# Altium PCB Copy of PCB2.PcbDoc
Units mm, origin at the board's own origin, x right, y up, seen from the top; angles counter-clockwise.
Board outline 79.5 x 87 mm, 2 copper layers (Top Layer, Bottom Layer); 60 components, 155 nets, 264 pads, 23 vias.
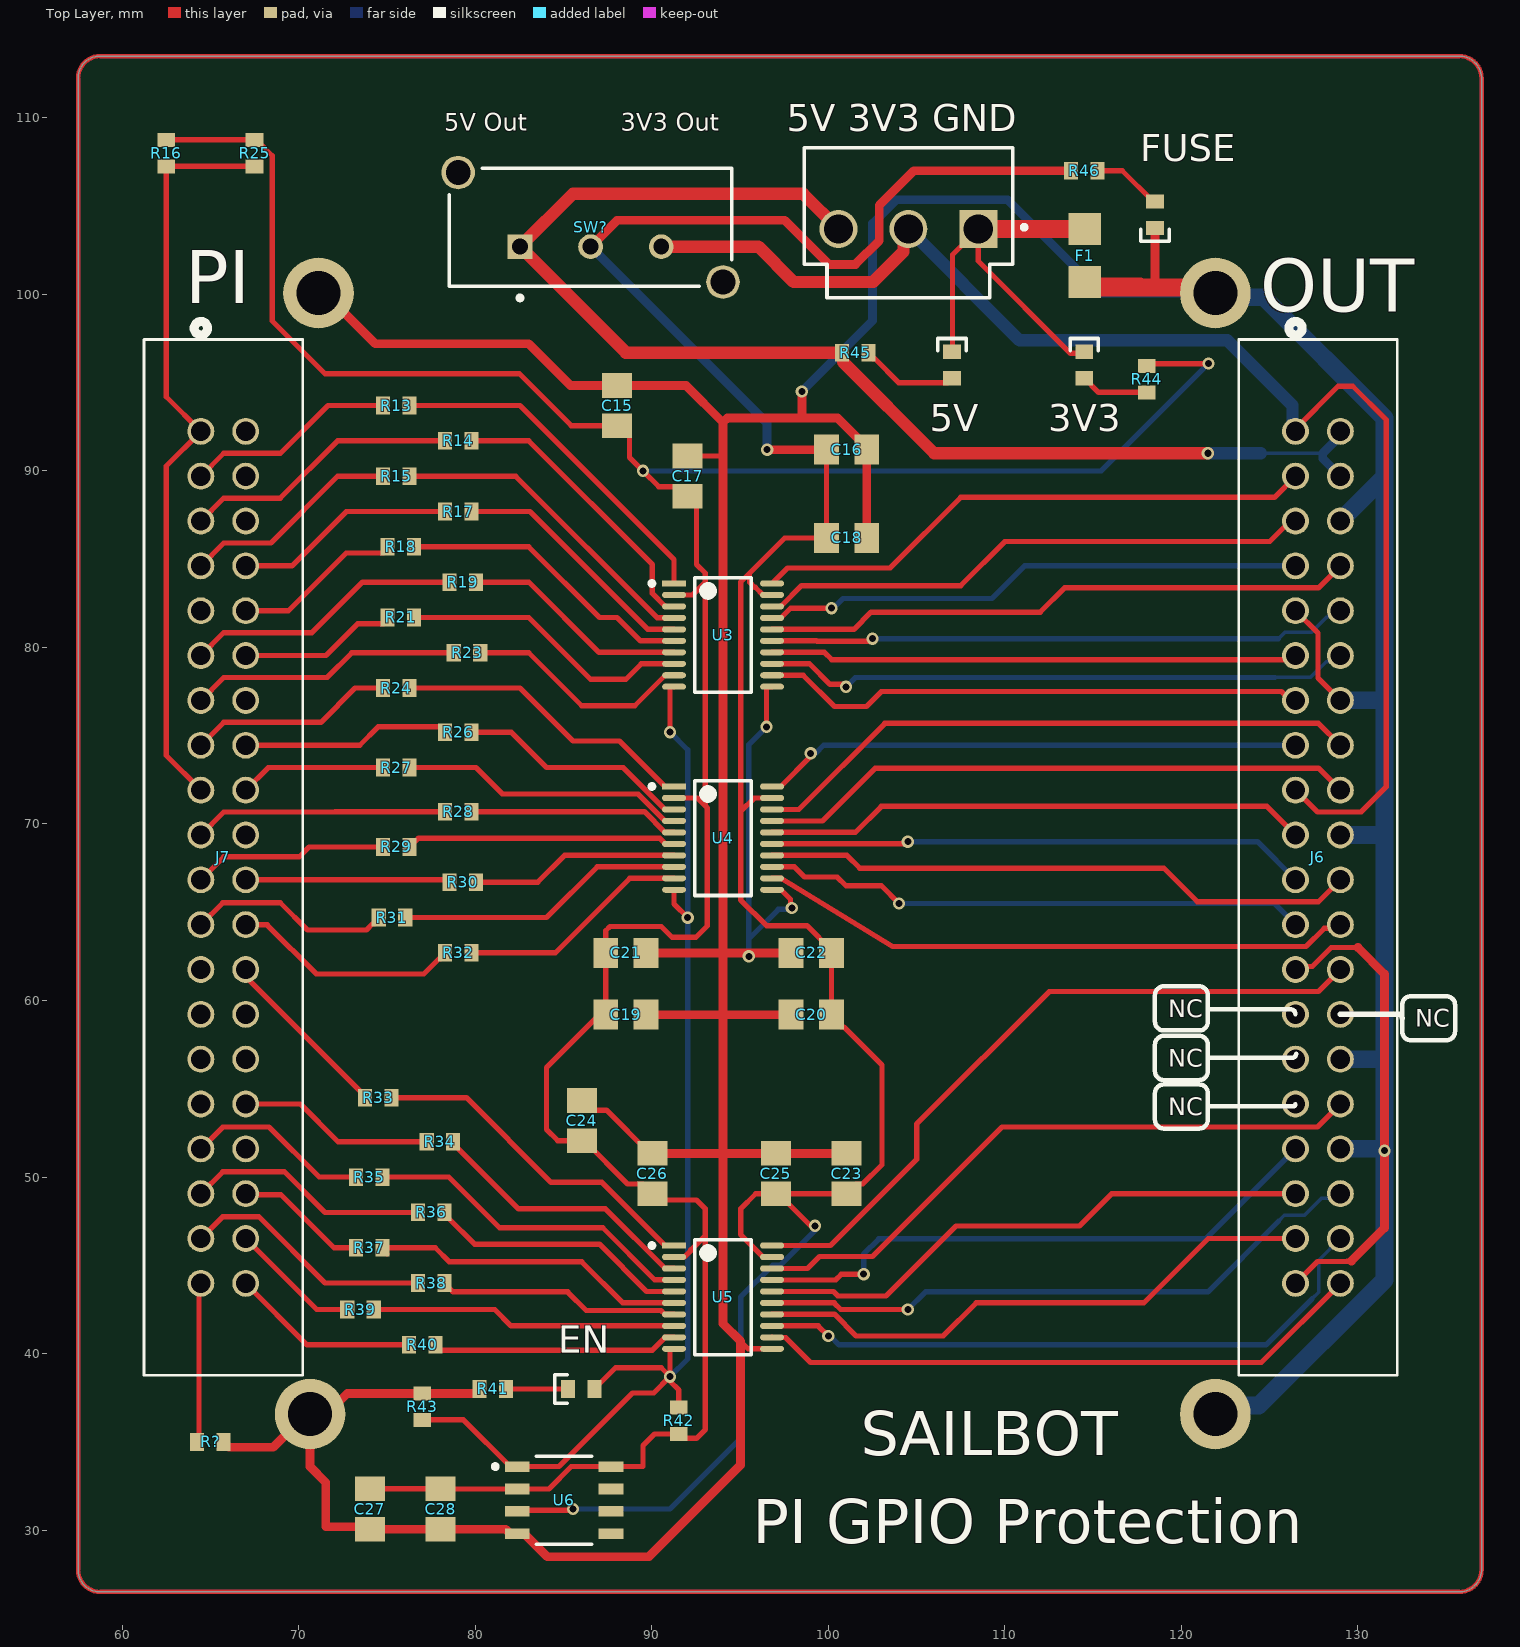
[diagram p0: Top Layer view]
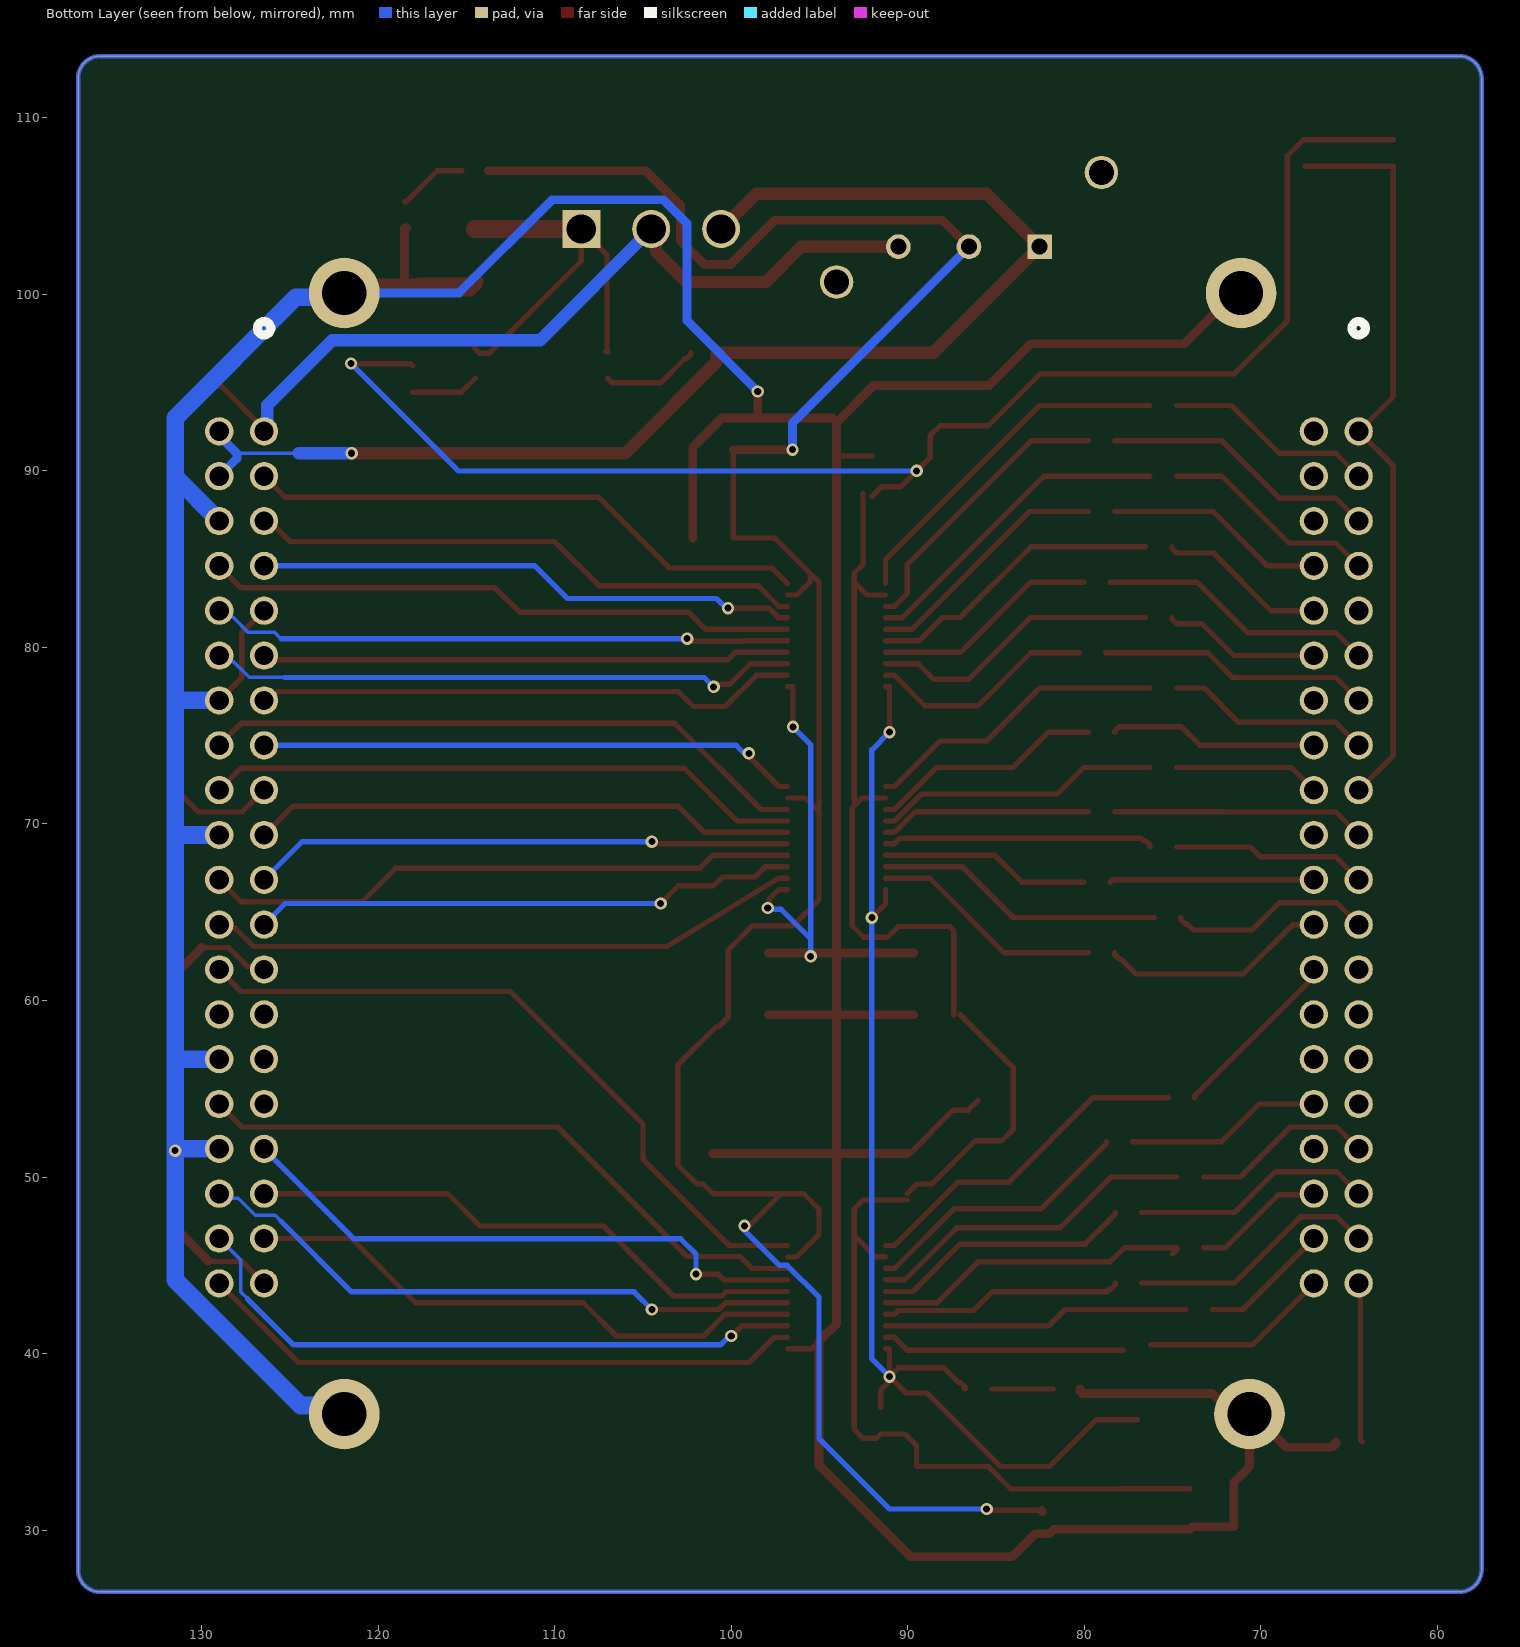
[diagram p1: Bottom Layer view, seen from below]

## Layer stack, top to bottom
Top Solder: solder mask 0.0102, Solder Resist, Dk 3.5
Top Layer: signal copper 0.0356
Dielectric 1: dielectric 0.32, FR-4, Dk 4.8
Bottom Layer: signal copper 0.0356
Bottom Solder: solder mask 0.0102, Solder Resist, Dk 3.5

## Board outline
57.5,27.77 57.5,112.23 cw(c58.77,112.23) 58.77,113.5 135.73,113.5 cw(c135.73,112.23) 137,112.23 137,27.77 cw(c135.73,27.77) 135.73,26.5 58.77,26.5 cw(c58.77,27.77)

## Design rules (kind name [scope] priority, off if disabled: settings)
Clearance [All] p1: gap=0.254 ignorepadtopadclearanceinfootprint=FALSE except(0: Arc-Hole Track-Hole SMDPad-Hole THPad-Hole Via-Hole Fill-Hole Poly-Hole Region-Hole Text-Hole; 0.127: Arc-Arc Arc-Track Arc-SMDPad Track-Track Track-SMDPad SMDPad-SMDPad; 0.33: Arc-THPad Arc-Via Track-THPad Track-Via SMDPad-THPad SMDPad-Via THPad-Via Via-Via; 0.5: THPad-THPad)
DiffPairsRouting [All] p1: maxlimit=0.2 minlimit=0.2 mostfreqgap=0.2 toplayer_minwidth=0.235 toplayer_maxwidth=0.235 toplayer_prefwidth=0.235 bottomlayer_minwidth=0.235 bottomlayer_maxwidth=0.235 bottomlayer_prefwidth=0.235 impedanceprofiledriven=TRUE impedanceprofileid={3DAFF3E0-E45B-4C19-A753-60FD53768F31} maxuncoupledlength=12.7
HoleSize [IsVia] p1: absolutevalues=TRUE maxlimit=2.54 minlimit=0 maxpercent=80.000 minpercent=20.000
PolygonConnect [All] p1: connectstyle=Direct reliefconductorwidth=0.254 reliefentries=4 polygonreliefangle="90 Angle" airgapwidth=0.254
RoutingVias [All] p1: holewidth=0.4 width=0.7 viastyle="Through Hole" minholewidth=0.3 minwidth=0.55 maxholewidth=0.4 maxwidth=0.9
SolderMaskExpansion [All] p1: expansion=0.102 istentingtop=FALSE
UnRoutedNet [All] p1: checkbadconnections=TRUE
Width [All] p1: maxlimit=1 minlimit=0.13 preferedwidth=0.3 minimp=50.000000 maximp=50.000000 favimp=50.000000
27 further rules are at their usual default settings.

## Classes and differential pairs
component class Shifter: 5V "5V 3V3 GND" C16 C18 C19 C20 C21 C22 C23 C24 C25 C26 C27 C28 EN F1 FUSE J6 J7 R13 R14 R15 R16 R17 R18 R19 R21 R23 R24 R25 R26 R27 R28 R29 R30 R31 R32 R33 R34 R35 R36 R37 R38 R39 R40 R41 R42 R43 R45 R46 R? SW? U3 U4 U5 U6
differential pair USB_D: +USB_D_P -USB_D_N

## Components (designator, comment, footprint, x,y, rotation, side; value= is the part's Value field where it differs from the comment)
3V3 "GREEN" LED_0603_GREEN 114.5,96 r270 top (schematic designator D_3V3)
5V "GREEN" LED_0603_GREEN 107,96 r270 top (schematic designator D_5V)
"5V 3V3 GND" "B3P-VH(LF)(SN)" JST-B3P-VH(LF)(SN)-3_V 104.534,104.95 r180 top (schematic designator Input)
C15 "22uF" CAP_0805 88.034,93.7 r270 top
C16 "22uF" CAP_0805 101.034,91.2 r0 top
C17 "100nF" CAP_0805 92.034,89.7 r270 top
C18 "100nF" CAP_0805 101.034,86.2 r0 top
C19 "22uF" CAP_0805 88.534,59.2 r180 top
C20 "22uF" CAP_0805 99.034,59.2 r180 top
C21 "100nF" CAP_0805 88.534,62.7 r180 top
C22 "100nF" CAP_0805 99.034,62.7 r180 top
C23 "22uF" CAP_0805 101.034,50.2 r90 top
C24 "22uF" CAP_0805 86.034,53.2 r270 top
C25 "100nF" CAP_0805 97.034,50.2 r90 top
C26 "100nF" CAP_0805 90.034,50.2 r270 top
C27 "22uF" CAP_0805 74.034,31.2 r90 top
C28 "100nF" CAP_0805 78.034,31.2 r270 top
EN "GREEN" LED_0603_GREEN 86,38 r0 top (schematic designator D_EN)
F1 "270mA" FUSE_1206 114.534,102.2 r270 top
FUSE "GREEN" LED_0603_GREEN 118.5,104.5 r90 top (schematic designator D_FUSE)
J6 "BUFFER_HIGH" CONN_3020-40-0100-00_CNC 126.46,92.24 r270 top
J7 "BUFFER_LOW" CONN_3020-40-0100-00_CNC 64.46,92.24 r270 top
R13 "1k" RES_0603 75.534,93.7 r0 top
R14 "1k" RES_0603 79.034,91.7 r0 top
R15 "1k" RES_0603 75.534,89.7 r0 top
R16 "1K" RES_0603 62.5,108 r90 top
R17 "1k" RES_0603 79.034,87.7 r0 top
R18 "1k" RES_0603 75.784,85.7 r0 top
R19 "1k" RES_0603 79.284,83.7 r0 top
R21 "1k" RES_0603 75.784,81.7 r0 top
R23 "1k" RES_0603 79.534,79.7 r0 top
R24 "1k" RES_0603 75.534,77.7 r0 top
R25 "1K" RES_0603 67.5,108 r90 top
R26 "1k" RES_0603 79.034,75.2 r0 top
R27 "1k" RES_0603 75.534,73.2 r0 top
R28 "1k" RES_0603 79.034,70.7 r0 top
R29 "1k" RES_0603 75.534,68.7 r0 top
R30 "1k" RES_0603 79.284,66.7 r0 top
R31 "1k" RES_0603 75.284,64.7 r0 top
R32 "1k" RES_0603 79.034,62.7 r0 top
R33 "1k" RES_0603 74.5,54.5 r0 top
R34 "1k" RES_0603 78,52 r0 top
R35 "1k" RES_0603 74,50 r0 top
R36 "1k" RES_0603 77.5,48 r0 top
R37 "1k" RES_0603 74,46 r0 top
R38 "1k" RES_0603 77.5,44 r0 top
R39 "1k" RES_0603 73.5,42.5 r0 top
R40 "1k" RES_0603 77,40.5 r0 top
R41 "1k" RES_0603 81,38 r0 top
R42 "Infinity" RES_0603 91.534,36.2 r90 top
R43 "Infinity" RES_0603 77,37 r90 top
R44 "1k" RES_0603 118.034,95.2 r270 top
R45 "1k" RES_0603 101.534,96.7 r0 top
R46 "1k" RES_0603 114.5,107 r0 top
R? "10K" RES_0603 65,35 r0 top
SW? "1825255-1" TECO-1825255-1_V 86.534,103.8 r0 top
U3 "TXS0108EPWR" FP-PW0020A-IPC_C 94.034,80.7 r0 top
U4 "TXS0108EPWR" FP-PW0020A-IPC_C 94.034,69.2 r0 top
U5 "TXS0108EPWR" FP-PW0020A-IPC_C 94.034,43.2 r0 top
U6 "LM2903DT" FP-SO8-SO-A-MFG 85.034,31.7 r0 top

## Footprints (in the part's own frame and the unit in brackets; to place one, negate y for a bottom-side part, rotate by r counter-clockwise, add the part's x,y. Pads: shape width x height; smd on the part's side, far side on the other; paste and mask are expansions set on the pad)
CAP_0805 [mm]
  rect 1.4x1.7 smd: 1(-1.143,0) 2(1.143,0)
  body extent -1.15,-0.76 1.15,0.79, height 1.01
CONN_3020-40-0100-00_CNC [mil]
  round 60 / inner round 60 / far side round 63 hole 43 paste-31.5 mask-31.5: 1(0,0) 2(0,100) 3(100,0) 4(100,100) 5(200,0) 6(200,100) 7(300,0) 8(300,100) 9(400,0) 10(400,100) 11(500,0) 12(500,100) 13(600,0) 14(600,100) 15(700,0) 16(700,100) 17(800,0) 18(800,100) 19(900,0) 20(900,100) 21(1000,0) 22(1000,100) 23(1100,0) 24(1100,100) 25(1200,0) 26(1200,100) 27(1300,0) 28(1300,100) 29(1400,0) 30(1400,100) 31(1500,0) 32(1500,100) 33(1600,0) 34(1600,100) 35(1700,0) 36(1700,100) 37(1800,0) 38(1800,100) 39(1900,0) 40(1900,100)
  silkscreen extent -245,-127 2105,227
FP-PW0020A-IPC_C [mm]
  rect 1.355x0.341 smd paste+0 mask+0: 1(-2.775,2.925)
  rrect100% 1.355x0.341 smd paste+0 mask+0: 2(-2.775,2.275) 3(-2.775,1.625) 4(-2.775,0.975) 5(-2.775,0.325) 6(-2.775,-0.325) 7(-2.775,-0.975) 8(-2.775,-1.625) 9(-2.775,-2.275) 10(-2.775,-2.925) 11(2.775,-2.925) 12(2.775,-2.275) 13(2.775,-1.625) 14(2.775,-0.975) 15(2.775,-0.325) 16(2.775,0.325) 17(2.775,0.975) 18(2.775,1.625) 19(2.775,2.275) 20(2.775,2.925)
  silkscreen extent -4.15,-3.25 1.6,3.25, body extent -3.55,-3.35 3.55,3.35, height 0.25
FP-SO8-SO-A-MFG [mm]
  rect 1.4x0.6 smd paste+0 mask+0: 1(-2.65,1.905) 2(-2.65,0.635) 3(-2.65,-0.635) 4(-2.65,-1.905) 5(2.65,-1.905) 6(2.65,-0.635) 7(2.65,0.635) 8(2.65,1.905)
  silkscreen extent -4.02,-2.5 1.57,2.5, body extent -3.45,-2.6 3.45,2.6, height 0.25
FUSE_1206 [mm]
  rect 1.8x1.84 smd: 1(-1.5,0) 2(1.5,0)
  body extent -1.65,-0.82 1.65,0.81, height 0.84
JST-B3P-VH(LF)(SN)-3_V [mm] "Connector, 3-Leads, Body 8.5x11.82mm, Pitch 3.96mm"
  rect 2.15x2.15 hole 1.65: 1(-3.96,1.25)
  round 2.15 hole 1.65: 2(0,1.25) 3(3.96,1.25)
  silkscreen extent -6.69,-3.35 5.91,5.15, body extent -5.91,-3.35 5.91,5.15, height 10.9
LED_0603_GREEN [mm]
  rect 0.8x1 smd: A(0.75,0) K(-0.75,0)
  silkscreen extent -1.5,-0.8 -0.8,0.8, body extent -0.8,-0.4 0.8,0.4, height 0.6
RES_0603 [mm]
  rect 0.8x1 smd: 1(-0.75,0) 2(0.75,0)
  body extent -0.8,-0.43 0.8,0.43, height 0.52
TECO-1825255-1_V [mm] "THD, 5-Leads, Body 6.7x16mm, Pitch 4mm"
  rect 1.4x1.4 hole 0.9: 1(-4,-1.1)
  round 1.4 hole 0.9: 2(0,-1.1) 3(4,-1.1)
  round 1.9 hole 1.4: MH1(-7.5,3.1) MH2(7.5,-3.1)
  silkscreen extent -8,-4.12 8,3.35, body extent -8,-3.35 8,3.35, height 12

## Part data
3V3 5V EN FUSE: library part LED_0603_GREEN, "LED 0603 GREEN SMD"
"5V 3V3 GND": library part CMP-002-00026-2, "Male Header, Pitch 3.96 mm, 1 x 3 Position, Height 10.9 mm, Tail Length 3.7 mm, -25 to 85 degC, RoHS, Bulk", Manufacturer=JST, Max Operating Temperature=85°C, Min Operating Temperature=-25°C, Package Description="Male Header, Pitch 3.96 mm, 1 x 3 Position, Height 10.9 mm, Tail Length 3.7 mm", Case/Package=B3P-VH(LF)(SN), Connector Type=Header, Datasheet URL=http://www.jst-mfg.com/product/pdf/eng/eVH.pdf, Datasheet Version=May-16, Gender=Male, Manufacturer URL=http://www.jst.com/home2.html, Mounting Technology=TH, Package Reference=B3P-VH(LF)(SN), RoHS Compliant=Unknown
C15 C16 C17 C18 C19 C20 C21 C22 C23 C24 C25 C26 C27 C28: library part CAP_0805_16V, "Capacitor SMD 0805 16V"
F1: library part FUSE_PPTC_1206, "Fuse PPTC SMD 1206 / SMD1206B010TF"
J6 J7: library part 3020-40-0100-00, "No Description Available", Mfr_Name="CNC Tech", RefDes=RefDes, Type=Type
R13 R14 R15 R16 R17 R18 R19 R21 R23 R24 R25 R26 R27 R28 R29 R30 R31 R32 R33 R34 R35 R36 R37 R38 R39 R40 R41 R42 R43 R44 R45 R46 R?: library part RES_0603, "Resistor SMD 0603"
SW?: library part CMP-011-00001-2, "Slide Switch, SPDT, 0.3A, 125 V, -20 to 85 degC, 5-Pin THD, RoHS, Tray", Current Rating=300mA, Manufacturer="TE Connectivity", Max Contact Resistance=30mohm, Max Operating Temperature=85°C, Max Voltage Rating (AC)=125V, Min Operating Temperature=-20°C, Operating Force=600gf, Package Description="5-Pin Through Hole Device, Body 6.7 x 16 mm, Pitch 4 mm", Package Quantity=560, Case/Package=1825255-1, Contact Finish=Silver, Contact Material=Copper, Contact Plating=Silver, Datasheet URL=http://www.te.com/commerce/DocumentDelivery/DDEController?Action=showdoc&DocId=Customer+Drawing%7F1825255%7FA4%7Fpdf%7FEnglish%7FENG_CD_1825255_A4_baseFilename.pdf%7F1825255-1, Datasheet Version="Rev. A4, 03/2014", Manufacturer URL=http://www.te.com/, Max Current Rating=300mA, Mounting Technology=TH, Package Reference=1825255-1, Packaging=Bulk, RoHS Compliant=True, Throw Configuration=SPDT, Voltage Rating (AC)=125V
U3 U4 U5: library part CMP-2000-04956-2, "IC TRNSLTR BIDIRECTIONAL 20TSSOP", Case/Package=TSSOP, High Level Output Current=-50mA, Low Level Output Current=50mA, Max Operating Temperature=85°C, Max Supply Voltage=5.5V, Min Operating Temperature=-40°C, Min Supply Voltage=1.2V, Nominal Supply Current=8uA, Output Current=620uA, Package Quantity=1, Quiescent Current=3uA, Contact Plating=Gold, Data Rate=60Mbps, Height=1.15mm, Lead Free="Lead Free", Length=6.5mm, Logic Function=Translator, Mount="Surface Mount", Number of Bits=8, Number of Channels=8, Number of Inputs=8, Number of Pins=20, Output Type=Voltage, Packaging="Tape and Reel", Propagation Delay=4.8ns, Radiation Hardening=No, REACH SVHC="No SVHC", Rise Time=6.3ns, RoHS Compliant=Yes, Series=-, Supply Current=8uA, Termination=SMD/SMT, Turn-On Delay Time=312ns, Weight=0.002716oz, Width=4.4mm
U6: library part CMP-12132-000004-1, "IC COMPARATOR LP DUAL 8-SOIC", Ambient Temperature Range High=+125°C, Ambient Temperature Range Low=-40°C, Input Bias Current=0.025uA, Input Offset Voltage=1mV, Manufacturer=STMicroelectronics, Max Dual Supply Voltage=18V, Max Junction Temp=+150°C, Max Supply Voltage=36V, Min Dual Supply Voltage=1V, Min Supply Voltage=2V, Nominal Supply Current=0.4-1mA, Output Current Per Channel=16mA, Package=SO8-SO-A, Temperature="to +150°C", Voltage Gain=200V/mV, Automotive=No, Category=IC, ComponentLink2Description=Datasheet, ComponentLink2URL=https://www.st.com/content/ccc/resource/technical/document/datasheet/44/f7/9d/99/42/20/45/fd/CD00000534.pdf/files/CD00000534.pdf/jcr:content/translations/en.CD00000534.pdf, Device Class L1="Integrated Circuits (ICs)", Device Class L2="Linear ICs", Device Class L3=Comparators, Digikey Description="IC COMPARATOR LP DUAL 8-SOIC", Footprint Url=https://www.st.com/content/ccc/resource/technical/document/datasheet/group3/16/9a/68/4c/7d/03/4a/09/DM00396770/files/DM00396770.pdf/jcr:content/translations/en.DM00396770.pdf, Height=1.75mm, Ipc Land Pattern Name=SOIC127P600X175-8, Lead Free=Yes, Manufacturer Part Number=LM2903DT, Mouser Description="Analog Comparators Lo-Pwr Dual Voltage", Number of Channels=2, Octopart=https://octopart.com/lm2903dt-stmicroelectronics-428473, Response Time=1.3us, RoHS=TRUE, Standoff Height=0.1mm, Temperature Range High=+150°C

## Free pads (board coordinates)
  round 4 hole 2.5: 5(71.12,100.076) 6(121.92,100.076) 7(121.92,36.576) 8(70.645,36.576)

## Via types
v1: diameter 0.7, hole 0.4, Top Layer to Bottom Layer, 23 vias

## Nets (pads, with @x,y where several pads share a name; then routed paths per layer and width w, separated by ;. In a path a pad name is that pad's centre, name@x,y a point inside that pad or via, vN(x,y) a via of type N, cw(c..) or ccw(c..) an arc to the next point about the centre after c; other vN are vias at no path point)
3V3: "5V 3V3 GND.2" J6.1 J6.17 SW?.3 | length 78.2
  Top Layer w0.3: J6.17 127.702,70.678 130.178,70.678 131.592,72.092 131.592,92.908 129.703,94.797 128.875,94.797 J6.1@126.46,92.382
  Top Layer w0.7: SW?.3 96.034,102.7 98.034,100.7 102.534,100.7 104.256,102.423 104.256,103.423 104.534,103.7
  Top Layer w1: J6.1 J6.1@126.46,92.382
  Bottom Layer w0.7: 104.534,103.7 110.838,97.396 122.604,97.396 126.288,93.712 126.288,92.412 J6.1
3V3PI: C15.2 C17.2 C19.2 C21.2 C24.2 C26.2 C27.2 C28.1 R16.2 R25.2 R42.1 R44.1 U3.2 U4.2 U5.2 U6.2 U6.8 | length 176.7
  Top Layer w0.3: R16.2 R25.2 67.6,108.75 68.5,107.85 68.5,98.5 71.5,95.5 82.5,95.5 85.443,92.557 88.184,92.557 88.734,92.007 88.734,90.768 89.5,90.002 v1(89.5,90) 90.393,89.107 91.484,89.107 C17.2 ; C27.2 C28.1 78.038,32.339 82.38,32.339 U6.2 84.169,32.335 85.439,33.605 U6.8 89.506,33.605 89.506,34.795 90.161,35.45 R42.1 91.784,35.2 92.534,35.2 93.034,35.7 93.034,46.7 ; C19.2@87.034,59.2 84.034,56.2 84.034,52.7 84.677,52.057 C24.2 86.184,52.057 88.634,49.607 89.484,49.607 C26.2 ; C19.2 C21.2 87.391,63.953 87.637,64.2 90.534,64.2 91.149,63.585 92.495,63.585 93.149,64.238 93.149,70.909 93.034,71.024 ; C26.2@90.034,48.7 92.534,48.7 93.034,48.2 93.034,46.7 ; U5.2 91.266,45.483 91.856,45.483 92.213,45.84 92.213,45.879 93.034,46.7 ; U4.2 92.583,71.475 93.034,71.024 ; U3.2 92.309,82.975 93.034,83.7 ; C17.2@92.534,88.7 92.534,84.7 93.034,84.2 93.034,83.7 ; R44.1 118.159,96.075 121.528,96.075 v1(121.534,96.081) ; 93.034,71.024 93.034,83.7
  Bottom Layer w0.3: v1(89.5,90) 115.453,90 v1(121.534,96.081)
3V3PI_Unprotected: J7.1 J7.17 R16.1 R25.1 | length 42.8
  Top Layer w0.3: J7.17 62.5,73.88 62.5,90.28 J7.1 62.5,94.2 R16.1 R25.1
5V: "5V 3V3 GND.3" J6.2 J6.4 R45.1 SW?.1 | length 74.1
  Top Layer w0.7: 100.574,103.7 98.574,105.7 85.534,105.7 SW?.1 88.534,96.7 R45.1 100.834,96.65 100.834,96.166 106,91 v1(121.5,91)
  Bottom Layer w0.2: 124.5,91 128,91
  Bottom Layer w0.5: J6.4 128,90.7 128,91 129,92 J6.2
  Bottom Layer w0.7: v1(121.5,91) 124.5,91
CMP_Out: EN.A R42.2 R43.1 U3.10 U4.10 U5.10 U6.1 | length 68.2
  Top Layer w0.3: R43.1 79.339,36.25 81.984,33.605 U6.1 84.748,33.605 88.918,37.775 90.109,37.775 v1(91.034,38.7) ; EN.A@86.825,38.075 EN.A 86.75,38.1 87,38.35 87.1,38.35 87.95,39.2 90.534,39.2 v1(91.034,38.7) ; v1(91.034,75.2) 91.034,77.756 91.052,77.775 U3.10 ; U5.10 91.052,40.275 91.034,40.256 v1(91.034,38.7) ; U4.10 91.258,65.475 v1(92.034,64.7) ; R42.2 91.534,37.938 91.034,38.438 v1(91.034,38.7)
  Bottom Layer w0.3: v1(91.034,38.7) 92.034,39.7 v1(92.034,64.7) 92.034,74.2 v1(91.034,75.2)
ENABLE_LED: EN.K R41.2 | length 3.5
  Top Layer w0.3: R41.2 EN.K
GND: C15.1 C16.2 C17.1 C18.2 C19.1 C20.2 C21.1 C22.2 C23.2 C24.1 C25.2 C26.1 C27.1 C28.2 F1.2 FUSE.K J6.6 J6.9 J6.14 J6.20 J6.25 J6.30 J6.34 J6.39 pad.5 pad.6 pad.7 pad.8 R41.1 R43.2 R?.2 U3.11 U4.11 U5.11 U6.4 | length 375.4
  Top Layer w0.3: C24.1 86.584,53.793 87.434,53.793 89.884,51.343 C26.1 ; C17.1 93.891,90.843 94.034,90.7 ; 95.034,40.7 95.459,40.275 U5.11 ; v1(96.5,75.5) 96.5,77.756 96.519,77.775 U3.11 ; U4.11 97.316,66.275 97.855,65.736 97.855,65.321 v1(97.932,65.244) ; J6.39 127.702,45.222 129.372,45.222 129.4,45.25 129.628,45.25 ; J6.25 126.625,61.925 127.409,61.925 128.486,63.002 129.998,63.002 ; J6.9 127.73,80.81 127.73,78.27 J6.14
  Top Layer w0.5: R?.2 65.75,34.9 65.9,34.75 66,34.75 66.05,34.7 68.555,34.7 pad.8@70.355,36.5 ; pad.8@70.645,36.5 70.645,33.589 71.534,32.7 71.534,30.2 73.891,30.2 C27.1 C28.2 81.722,30.057 81.984,29.795 U6.4 82.784,29.795 84.079,28.5 89.834,28.5 95.034,33.7 95.034,40.7 94.034,41.7 94.034,51.343 ; pad.8 71.592,36.576 72.766,37.75 R43.2 80.1,37.75 80.25,37.9 R41.1 ; pad.5@71.534,100 74.334,97.2 83.034,97.2 85.391,94.843 C15.1 91.934,94.843 94.034,92.743 ; C19.1 94.034,59.2 ; C21.1 94.034,62.7 ; C26.1 94.034,51.343 ; C20.2 94.034,59.2 ; C22.2 94.034,62.7 ; v1(98.5,94.5) 98.5,92.993 ; C23.2 C25.2 94.034,51.343 ; C18.2 C16.2 102.177,91.35 100.534,92.993 98.5,92.993 ; F1.2 117.684,100.7 ; FUSE.K@118.4,103.75 FUSE.K 118.5,100.388 ; 129.628,45.25 131.5,47.122 131.5,61.5 129.998,63.002 ; 94.034,51.343 94.034,59.2 ; 94.034,59.2 94.034,62.7 ; 94.034,62.7 94.034,90.7 94.034,92.743 ; 94.034,92.743 94.284,92.993 98.5,92.993
  Top Layer w1: F1.2 114.846,100.388 118.5,100.388 121.608,100.388 pad.6
  Bottom Layer w0.3: v1(95.5,62.5) 95.5,63.5 ; v1(96.5,75.5) 95.5,74.5 95.5,63.5 ; v1(97.932,65.244) 97.855,65.168 97.168,65.168 95.5,63.5
  Bottom Layer w0.5: v1(98.5,94.5) 102.5,98.5 102.5,104.007 103.848,105.355 110.145,105.355 115.424,100.076 pad.6 ; 131.18,56.68 131.5,57 ; 131.38,69.38 131.5,69.5
  Bottom Layer w1: pad.7 122.404,37.06 124.386,37.06 131.5,44.175 v1(131.5,51.5) ; pad.6 122.166,99.83 124.67,99.83 131.5,93 131.5,89.66 ; J6.34 131.327,51.6 131.427,51.5 v1(131.5,51.5) ; J6.30 131.18,56.68 ; J6.20 131.38,69.38 ; J6.14 131.5,77 ; J6.6 131.5,89.66 ; v1(131.5,51.5) 131.5,57 131.5,69.5 131.5,77 ; 131.5,77 131.5,89.66
GND_INPUT: 3V3.K 5V.K "5V 3V3 GND.1" F1.1 | length 23.8
  Top Layer w0.3: 5V.K 5V.K@107.034,96.75 ; 5V.K@107.1,96.75 5V.K@107.034,96.75 ; 3V3.K@114.534,96.966 114.225,96.658 113.726,96.658 108.494,101.89 108.494,103.7 107.034,102.24 5V.K@107.034,96.75
  Top Layer w1: 108.494,103.7 F1.1
GPIO_3: 
GPIO_5: 
GPIO_7: 
GPIO_8: 
GPIO_10: 
GPIO_11: 
GPIO_12: 
GPIO_13: 
GPIO_15: 
GPIO_16: 
GPIO_18: 
GPIO_19: 
GPIO_21: 
GPIO_22: 
GPIO_23: 
GPIO_24: 
GPIO_26: 
GPIO_27: 
GPIO_28: 
GPIO_29: 
GPIO_31: 
GPIO_32: 
GPIO_33: 
GPIO_35: 
GPIO_36: 
GPIO_37: 
GPIO_38: 
GPIO_40: 
IN_3: R13.2 U3.1 | length 19.9
  Top Layer w0.3: R13.2 82.534,93.7 91.258,84.975 U3.1
IN_5: R14.2 U3.3 | length 16.3
  Top Layer w0.3: R14.2 83.034,91.7 90.034,84.7 90.034,83.06 90.73,82.363 90.73,82.356 90.762,82.325 U3.3
IN_7: R15.2 U3.4 | length 18.3
  Top Layer w0.3: R15.2 82.291,89.7 90.316,81.675 U3.4
IN_8: R17.2 U3.5 | length 14.2
  Top Layer w0.3: R17.2 83.1,87.7 89.775,81.025 U3.5
IN_10: R18.2 U3.6 | length 16.9
  Top Layer w0.3: R18.2 83.034,85.7 87.034,81.7 88.034,81.7 89.359,80.375 U3.6
IN_11: R19.2 U3.7 | length 12.9
  Top Layer w0.3: R19.2 83.034,83.7 87.009,79.725 U3.7
IN_12: R21.2 U3.8 | length 16.5
  Top Layer w0.3: R21.2 83.034,81.7 86.534,78.2 88.534,78.2 89.409,79.075 U3.8
IN_13: R23.2 U3.9 | length 12.9
  Top Layer w0.3: R23.2 83.034,79.7 86.034,76.7 89.037,76.7 90.762,78.425 U3.9
IN_15: R24.2 U4.1 | length 17.3
  Top Layer w0.3: R24.2 82.534,77.7 85.534,74.7 88.176,74.7 90.751,72.125 U4.1
IN_16: R26.2 U4.3 | length 13.3
  Top Layer w0.3: R26.2 82.034,75.2 84.034,73.2 88.376,73.2 90.751,70.825 U4.3
IN_18: R27.2 U4.4 | length 16.2
  Top Layer w0.3: R27.2 80.034,73.2 81.534,71.7 89.226,71.7 90.751,70.175 U4.4
IN_19: R28.2 U4.5 | length 12
  Top Layer w0.3: R28.2 89.576,70.7 90.751,69.525 U4.5
IN_21: R29.2 U4.6 | length 15.4
  Top Layer w0.3: R29.2 76.284,68.8 76.534,69.05 76.634,69.05 76.784,69.2 90.443,69.2 90.743,68.9 90.743,68.894 90.762,68.875 U4.6
IN_22: R30.2 U4.7 | length 11.9
  Top Layer w0.3: R30.2 83.534,66.7 85.059,68.225 U4.7
IN_23: R31.2 U4.8 | length 16.4
  Top Layer w0.3: R31.2 84.034,64.7 86.909,67.575 U4.8
IN_24: R32.2 U4.9 | length 13.2
  Top Layer w0.3: R32.2 84.534,62.7 88.759,66.925 U4.9
IN_26: R33.2 U5.1 | length 19.5
  Top Layer w0.3: R33.2 79.5,54.5 84.3,49.7 87.176,49.7 90.751,46.125 U5.1
IN_32: R34.2 U5.3 | length 15.5
  Top Layer w0.3: R34.2 78.75,51.9 82.45,48.2 87.376,48.2 90.738,44.838 91.245,44.838 U5.3
IN_33: R35.2 U5.4 | length 18.9
  Top Layer w0.3: R35.2 78.5,50 81.369,47.131 87.219,47.131 90.162,44.188 90.709,44.188 90.714,44.183 91.25,44.183 U5.4
IN_35: R36.2 U5.5 | length 14.9
  Top Layer w0.3: R36.2 78.25,47.907 78.5,47.657 79.957,46.2 87.034,46.2 89.709,43.525 U5.5
IN_36: R37.2 U5.6 | length 18.3
  Top Layer w0.3: R37.2@75,45.65 74.75,45.9 R37.2 77.734,46 78.534,45.2 86.034,45.2 88.359,42.875 U5.6
IN_37: R38.2 U5.7 | length 13.8
  Top Layer w0.3: R38.2 78.25,43.9 78.5,43.65 78.6,43.65 78.75,43.5 85.234,43.5 86.286,42.448 90.517,42.448 90.732,42.233 91.25,42.233 U5.7
IN_38: R39.2 U5.8 | length 17.4
  Top Layer w0.3: R39.2 81.105,42.5 82.03,41.575 U5.8
IN_40: R40.2 U5.9 | length 13.8
  Top Layer w0.3: R40.2@77.8,40.2 90.043,40.2 90.73,40.887 90.73,40.894 90.762,40.925 U5.9
LED_1: 
LED_2: 
LED_3: 
LED_4: 
LED_5: 
LED_6: 
LED_PWR_K: 
MCU_BOOT: 
MCU_JTDI: 
MCU_NRST: 
MCU_OSC_IN: 
MCU_OSC_OUT: 
MCU_PIN_1: 
MCU_PIN_2: 
MCU_PIN_3: 
MCU_PIN_4: 
MCU_PIN_5: 
MCU_PIN_6: 
MCU_SWCLK: 
MCU_SWDIO: 
MCU_SWITCH_1: 
MCU_SWITCH_2: 
MCU_SWO: 
NetC3_2: 
NetD1_K: 
NetD2_K: 
NetD3_K: 
NetD4_K: 
NetD5_K: 
NetD6_K: 
NetD_3V3_A: 3V3.A R44.2 | length 3.9
  Top Layer w0.3: 3V3.A 115.3,94.45 R44.2
NetD_5V_A: 5V.A R45.2 | length 5.6
  Top Layer w0.3: R45.2 102.284,96.6 102.534,96.35 102.634,96.35 103.984,95 106.75,95 5V.A
NetD_FUSE_A: FUSE.A R46.2 | length 4
  Top Layer w0.3: R46.2 116.65,107 118.4,105.25 FUSE.A
OUT_3: J6.3 U3.20 | length 32.2
  Top Layer w0.3: U3.20 97.684,84.5 103.5,84.5 107.5,88.5 125.26,88.5 J6.3
OUT_5: J6.5 U3.18 | length 31.7
  Top Layer w0.3: U3.18 97.305,82.325 97.337,82.356 97.337,82.363 98.474,83.5 107.5,83.5 110,86 125,86 126.16,87.16 J6.5
OUT_7: J6.7 U3.17 | length 30.9
  Top Layer w0.3: U3.17 96.822,81.688 97.33,81.688 97.868,82.227 v1(100.18,82.227)
  Bottom Layer w0.3: v1(100.18,82.227) 100.294,82.227 100.841,82.774 109.274,82.774 111.12,84.62 J6.7
OUT_8: J6.8 U3.16 | length 33.7
  Top Layer w0.3: U3.16 101.448,81.025 102.423,82 112,82 113.378,83.378 127.758,83.378 J6.8
OUT_10: J6.10 U3.15 | length 32.9
  Top Layer w0.3: U3.15 99.329,80.375 99.361,80.343 102.343,80.343 v1(102.5,80.5)
  Bottom Layer w0.2: 125.5,80.5 125.85,80.85 127.35,80.85 128.212,81.712 128.253,81.712 128.353,81.812 128.732,81.812 J6.10
  Bottom Layer w0.3: v1(102.5,80.5) 125.5,80.5
OUT_11: J6.11 U3.14 | length 29.9
  Top Layer w0.3: U3.14 96.814,79.72 99.78,79.72 100.193,79.307 126.227,79.307 J6.11
OUT_12: J6.12 U3.13 | length 33.5
  Top Layer w0.3: U3.13 98.925,79.075 100.091,77.909 100.861,77.909 v1(101,77.77)
  Bottom Layer w0.2: 125.298,78.298 125.31,78.31 127.31,78.31 128.192,79.192 128.273,79.192 128.353,79.272 128.732,79.272 J6.12
  Bottom Layer w0.3: v1(101,77.77) 101.528,78.298 125.298,78.298
OUT_13: J6.13 U3.12 | length 30.9
  Top Layer w0.3: U3.12 98.575,78.425 100.345,76.655 102.155,76.655 103,77.5 125.672,77.5 126.172,77 J6.13
OUT_15: J6.15 U4.20 | length 30.7
  Top Layer w0.3: U4.20 97.305,72.125 99,73.82 v1(99,74)
  Bottom Layer w0.3: v1(99,74) 99.262,74 99.722,74.46 J6.15
OUT_16: J6.16 U4.18 | length 34.7
  Top Layer w0.3: U4.18 98.325,70.825 103.202,75.702 127.758,75.702 J6.16
OUT_18: J6.18 U4.17 | length 33.9
  Top Layer w0.3: U4.17 96.812,70.172 99.672,70.172 102.662,73.162 127.758,73.162 J6.18
OUT_19: J6.19 U4.16 | length 30.9
  Top Layer w0.3: U4.16 101.525,69.525 103,71 124.84,71 J6.19
OUT_21: J6.21 U4.15 | length 30.6
  Top Layer w0.3: U4.15 96.817,68.883 104.383,68.883 v1(104.5,69)
  Bottom Layer w0.3: v1(104.5,69) 124.3,69 J6.21
OUT_22: J6.22 U4.14 | length 33.8
  Top Layer w0.3: U4.14 101.051,68.225 101.776,67.5 119,67.5 120.902,65.598 127.758,65.598 J6.22
OUT_23: J6.23 U4.13 | length 31
  Top Layer w0.3: U4.13 98.083,67.575 98.658,67 100.5,67 101,66.5 103,66.5 v1(104,65.5)
  Bottom Layer w0.3: v1(104,65.5) 125.26,65.5 J6.23
OUT_24: J6.24 U4.12 | length 33.8
  Top Layer w0.3: U4.12 97.316,66.925 103.673,63.058 127.058,63.058 128.093,64.093 128.793,64.093 J6.24
OUT_26: J6.26 U5.20 | length 39.8
  Top Layer w0.3: U5.20 100.125,46.125 105,51 105,53 112.518,60.518 127.758,60.518 J6.26
OUT_27: J6.27
OUT_28: J6.28
OUT_29: J6.29
OUT_31: J6.31
OUT_32: J6.32 U5.18 | length 36
  Top Layer w0.3: U5.18 98.825,44.825 99.5,45.5 102.5,45.5 109.842,52.842 127.702,52.842 J6.32
OUT_33: J6.33 U5.17 | length 33.4
  Top Layer w0.3: U5.17 100.413,44.175 100.738,44.5 v1(102,44.5)
  Bottom Layer w0.3: v1(102,44.5) 102,45.64 102.86,46.5 121.36,46.5 J6.33
OUT_35: J6.35 U5.16 | length 32.2
  Top Layer w0.3: U5.16 100.283,43.525 100.538,43.27 103.27,43.27 107.227,47.227 114.227,47.227 116.06,49.06 J6.35
OUT_36: J6.36 U5.15 | length 35.1
  Top Layer w0.3: U5.15 100.329,42.875 100.704,42.5 v1(104.5,42.5)
  Bottom Layer w0.2: 125.5,47.5 125.83,47.83 126.97,47.83 127.932,48.792 128.732,48.792 J6.36
  Bottom Layer w0.3: v1(104.5,42.5) 105.5,43.5 121.5,43.5 125.5,47.5
OUT_37: J6.37 U5.14 | length 32.4
  Top Layer w0.3: U5.14@96.823,42.239 96.83,42.233 97.353,42.233 97.359,42.239 100.338,42.239 101.577,41 106.5,41 108.384,42.884 117.884,42.884 121.52,46.52 J6.37
OUT_38: J6.38 U5.13 | length 36.2
  Top Layer w0.3: U5.13 99.425,41.575 v1(100,41)
  Bottom Layer w0.2: 127.395,43.105 127.77,43.48 127.77,45.29 J6.38
  Bottom Layer w0.3: v1(100,41) 100.108,41 100.608,40.5 124.79,40.5 127.395,43.105
OUT_40: J6.40 U5.12 | length 34.6
  Top Layer w0.3: U5.12 96.817,40.917 97.583,40.917 99,39.5 124.52,39.5 J6.40
PI_3: J7.3 R13.1 | length 12
  Top Layer w0.3: J7.3 65.758,90.998 68.96,90.998 71.662,93.7 R13.1
PI_5: J7.5 R14.1 | length 15.7
  Top Layer w0.3: J7.5 65.758,88.458 68.958,88.458 72.2,91.7 R14.1
PI_7: J7.7 R15.1 | length 12.4
  Top Layer w0.3: J7.7 65.758,85.918 68.42,85.918 72.202,89.7 R15.1
PI_8: J7.8 R17.1 | length 12.6
  Top Layer w0.3: J7.8 69.62,84.62 72.7,87.7 R17.1
PI_10: J7.10 R18.1 | length 9.6
  Top Layer w0.3: J7.10 69.422,82.08 72.692,85.35 74.784,85.35 75.034,85.6 R18.1
PI_11: J7.11 R19.1 | length 15.8
  Top Layer w0.3: J7.11 65.758,80.838 70.755,80.838 73.617,83.7 R19.1
PI_12: J7.12 R21.1 | length 9
  Top Layer w0.3: J7.12 71.54,79.54 73.35,81.35 74.784,81.35 75.034,81.6 R21.1
PI_13: J7.13 R23.1 | length 15.4
  Top Layer w0.3: J7.13 65.758,78.298 71.61,78.298 73.012,79.7 R23.1
PI_15: J7.15 R24.1 | length 11.7
  Top Layer w0.3: J7.15 65.758,75.758 71.258,75.758 73.2,77.7 R24.1
PI_16: J7.16 R26.1 | length 11.9
  Top Layer w0.3: J7.16 73.46,74.46 74.5,75.5 78.034,75.5 78.284,75.25 R26.1
PI_18: J7.18 R27.1 | length 8.3
  Top Layer w0.3: J7.18 68.28,73.2 R27.1
PI_19: J7.19 R28.1 | length 14.4
  Top Layer w0.3: J7.19 65.758,70.678 72.05,70.678 72.072,70.7 R28.1
PI_21: J7.21 R29.1 | length 11.1
  Top Layer w0.3: J7.21 65.758,68.138 70.03,68.138 70.592,68.7 R29.1
PI_22: J7.22 R30.1 | length 11.6
  Top Layer w0.3: J7.22 78.394,66.84 R30.1
PI_23: J7.23 R31.1 | length 11.6
  Top Layer w0.3: J7.23 65.702,65.542 68.958,65.542 70.5,64 73.834,64 74.184,64.35 74.284,64.35 74.534,64.6 R31.1
PI_24: J7.24 R32.1 | length 13
  Top Layer w0.3: J7.24 67.012,64.288 68.212,64.288 71,61.5 77.084,61.5 77.934,62.35 78.034,62.35 78.284,62.6 R32.1
PI_26: J7.26 R33.1 | length 10.1
  Top Layer w0.3: J7.26 67.234,61.526 67.234,61.116 73.75,54.6 R33.1
PI_27: J7.27
PI_28: J7.28
PI_29: J7.29
PI_31: J7.31
PI_32: J7.32 R34.1 | length 11.1
  Top Layer w0.3: J7.32 70.096,54.14 72.236,52 R34.1
PI_33: J7.33 R35.1 | length 10.5
  Top Layer w0.3: J7.33 65.702,52.842 68.322,52.842 71.164,50 R35.1
PI_35: J7.35 R36.1 | length 13.8
  Top Layer w0.3: J7.35 65.702,50.302 69.198,50.302 71.5,48 R36.1
PI_36: J7.36 R37.1 | length 7.5
  Top Layer w0.3: J7.36 67.06,49 69,49 72,46 R37.1
PI_37: J7.37 R38.1 | length 14.4
  Top Layer w0.3: J7.37 65.702,47.762 67.738,47.762 71.5,44 R38.1
PI_38: J7.38 R39.1 | length 7.4
  Top Layer w0.3: J7.38 71.02,42.5 R39.1
PI_40: J7.40 R40.1 | length 10.7
  Top Layer w0.3: J7.40 70.48,40.5 R40.1
PI_GND_UnP: J7.39 R?.1 | length 9.1
  Top Layer w0.3: R?.1 64.355,35.105 64.355,43.875 J7.39
USB_D_N: 
USB_D_P: 
V_LOGIC: C16.1 C18.1 C20.1 C22.1 C23.1 C25.1 R46.1 SW?.2 U3.19 U4.19 U5.19 U6.3 | length 148.1
  Top Layer w0.3: U6.3@82.434,31.115 82.459,31.09 82.501,31.133 85.466,31.133 v1(85.534,31.2) ; U5.19 96.302,45.475 95.034,46.743 95.034,48.2 95.891,49.057 C25.1@97.184,49.057 ; U4.19 95.809,71.475 95.034,70.7 ; U3.19 96.291,82.975 95.858,83.407 95.826,83.407 95.534,83.7 95.534,84.2 ; v1(99.247,47.24) 99.001,47.24 C25.1@97.184,49.057 ; C16.1 C18.1 97.534,86.2 95.534,84.2 ; 95.034,70.7 95.034,83.7 95.534,84.2 ; 95.034,70.7 95.034,65.7 96.493,64.24 98.786,64.24 100.177,62.85 C22.1 C20.1 100.177,59.05 100.727,58.5 100.877,58.5 103.034,56.343 103.034,50.7 101.941,49.607 101.584,49.607 C23.1 C25.1@97.184,49.057
  Top Layer w0.5: U6.3 U6.3@82.434,31.115 ; SW?.2 88.034,104.2 97.534,104.2 100.034,101.7 101.534,101.7 102.879,103.045 102.879,105.045 104.834,107 R46.1 ; v1(96.534,91.2) C16.1
  Bottom Layer w0.3: v1(85.534,31.2) 91.034,31.2 95.034,35.2 95.034,43.2 96.834,45 97.261,45 99.247,46.986 v1(99.247,47.24)
  Bottom Layer w0.5: SW?.2 96.534,92.7 v1(96.534,91.2)
VBUS: 
XTAL_IN: 
pads on no net: J7.2 J7.4 J7.6 J7.9 J7.14 J7.20 J7.25 J7.30 J7.34 SW?.MH1 SW?.MH2 U6.5 U6.6 U6.7

## Other copper
Multi-Layer:
  lines w0.254: 57.5,27.77 ccw(c58.77,27.77) 58.77,26.5 135.73,26.5 ccw(c135.73,27.77) 137,27.77 137,112.23 ccw(c135.73,112.23) 135.73,113.5 126.5,113.5 58.77,113.5 ccw(c58.77,112.23) 57.5,112.23 57.5,27.77

## Silkscreen, mask and mechanical layers (free items; w line width, h text height)
Top Overlay:
  lines w0.254: 121.5,54 126.32,54 ccw(c126.32,54.14) 126.46,54.14 ; 121.5,56.75 126.25,56.75 ccw(c126.25,57) 126.5,57 ; 121.5,59.5 126.18,59.5 cw(c126.18,59.22) 126.46,59.22 ; 118.5,53.25 ccw(c119,53.25) 119,52.75 121,52.75 ccw(c121,53.25) 121.5,53.25 121.5,54.75 ccw(c121,54.75) 121,55.25 120,55.25 119,55.25 ccw(c119,54.75) 118.5,54.75 118.5,53.25 ; 118.5,56 ccw(c119,56) 119,55.5 121,55.5 ccw(c121,56) 121.5,56 121.5,57.5 ccw(c121,57.5) 121,58 120,58 119,58 ccw(c119,57.5) 118.5,57.5 118.5,56 ; 118.5,58.805 ccw(c119,58.805) 119,58.305 121,58.305 ccw(c121,58.805) 121.5,58.805 121.5,60.305 ccw(c121,60.305) 121,60.805 120,60.805 119,60.805 ccw(c119,60.305) 118.5,60.305 118.5,58.805 ; 132.5,58.25 ccw(c133,58.25) 133,57.75 135,57.75 ccw(c135,58.25) 135.5,58.25 135.5,59.75 ccw(c135,59.75) 135,60.25 134,60.25 133,60.25 ccw(c133,59.75) 132.5,59.75 132.5,58.25
  lines w0.3: 129,59.22 132.28,59.22 cw(c132.28,59) 132.5,59
  text "5V Out" at 78.254,109.254 h1
  text "3V3 Out" at 88.254,109.254 h1
  text "PI" at 63.586,99.5 h3
  text "OUT" at 124.472,99 h3
  text "NC" at 119.254,59.059 h1
  text "NC" at 133.254,58.504 h1
  text "NC" at 119.254,56.254 h1
  text "NC" at 119.254,53.504 h1
  text "SAILBOT" at 101.841,34.25 h2.5
  text "PI GPIO Protection" at 95.718,29.25 h2.5

## Text inside footprints (layer, text, board x,y; h text height)
3V3: Mechanical 13 "+" at 115.108,94.683 h0.5 r270
5V: Mechanical 13 "+" at 107.608,94.683 h0.5 r270
EN: Mechanical 13 "+" at 87.317,38.608 h0.5
FUSE: Mechanical 13 "+" at 117.892,105.817 h0.5 r90